# Altium PCB PCB1.PcbDoc
Units mm, origin at the board's own origin, x right, y up, seen from the top; angles counter-clockwise.
Board outline 72.5 x 62.5 mm, 2 copper layers (Top Layer, Bottom Layer); 18 components, 22 nets, 87 pads, 0 vias.
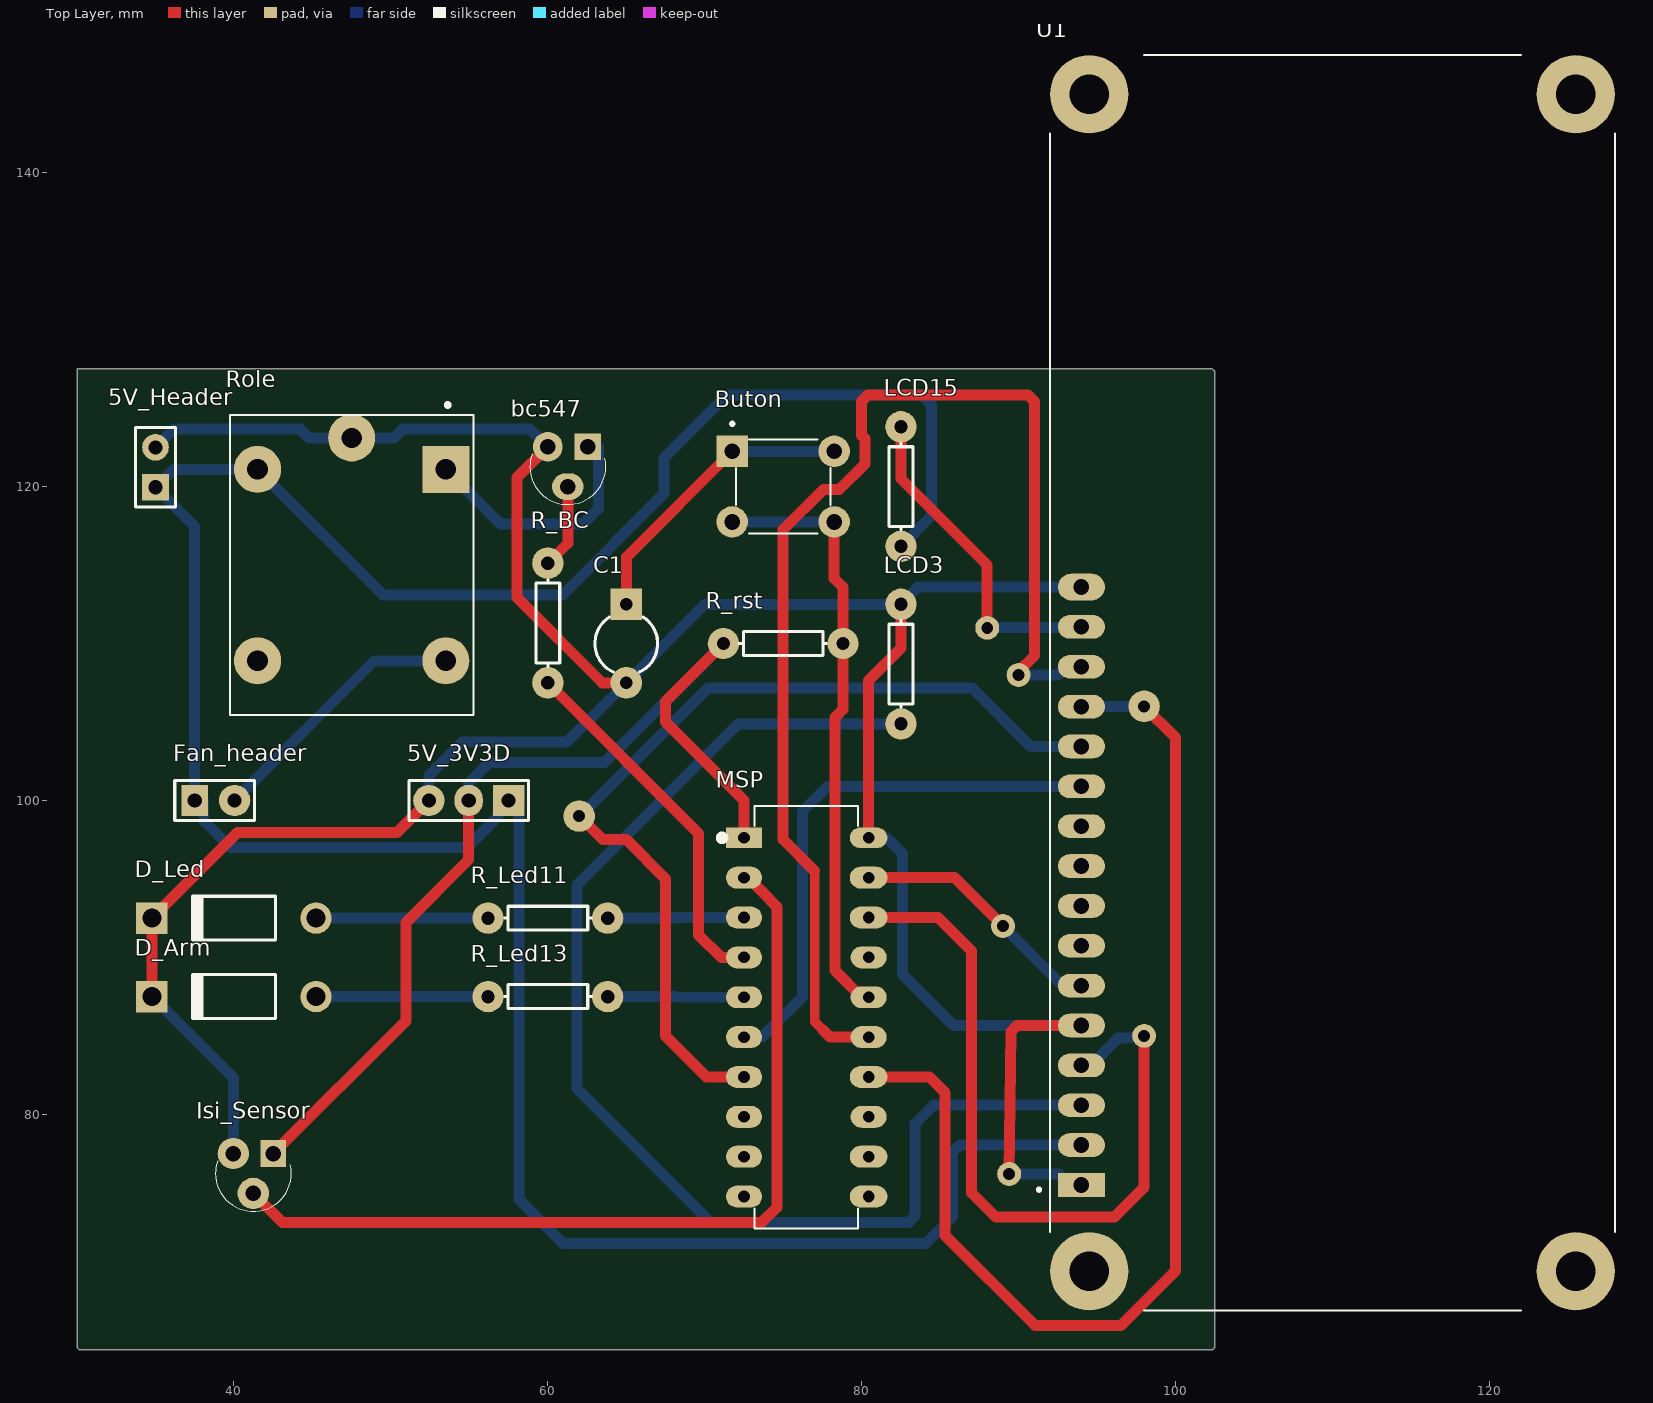
[diagram p0: Top Layer view]
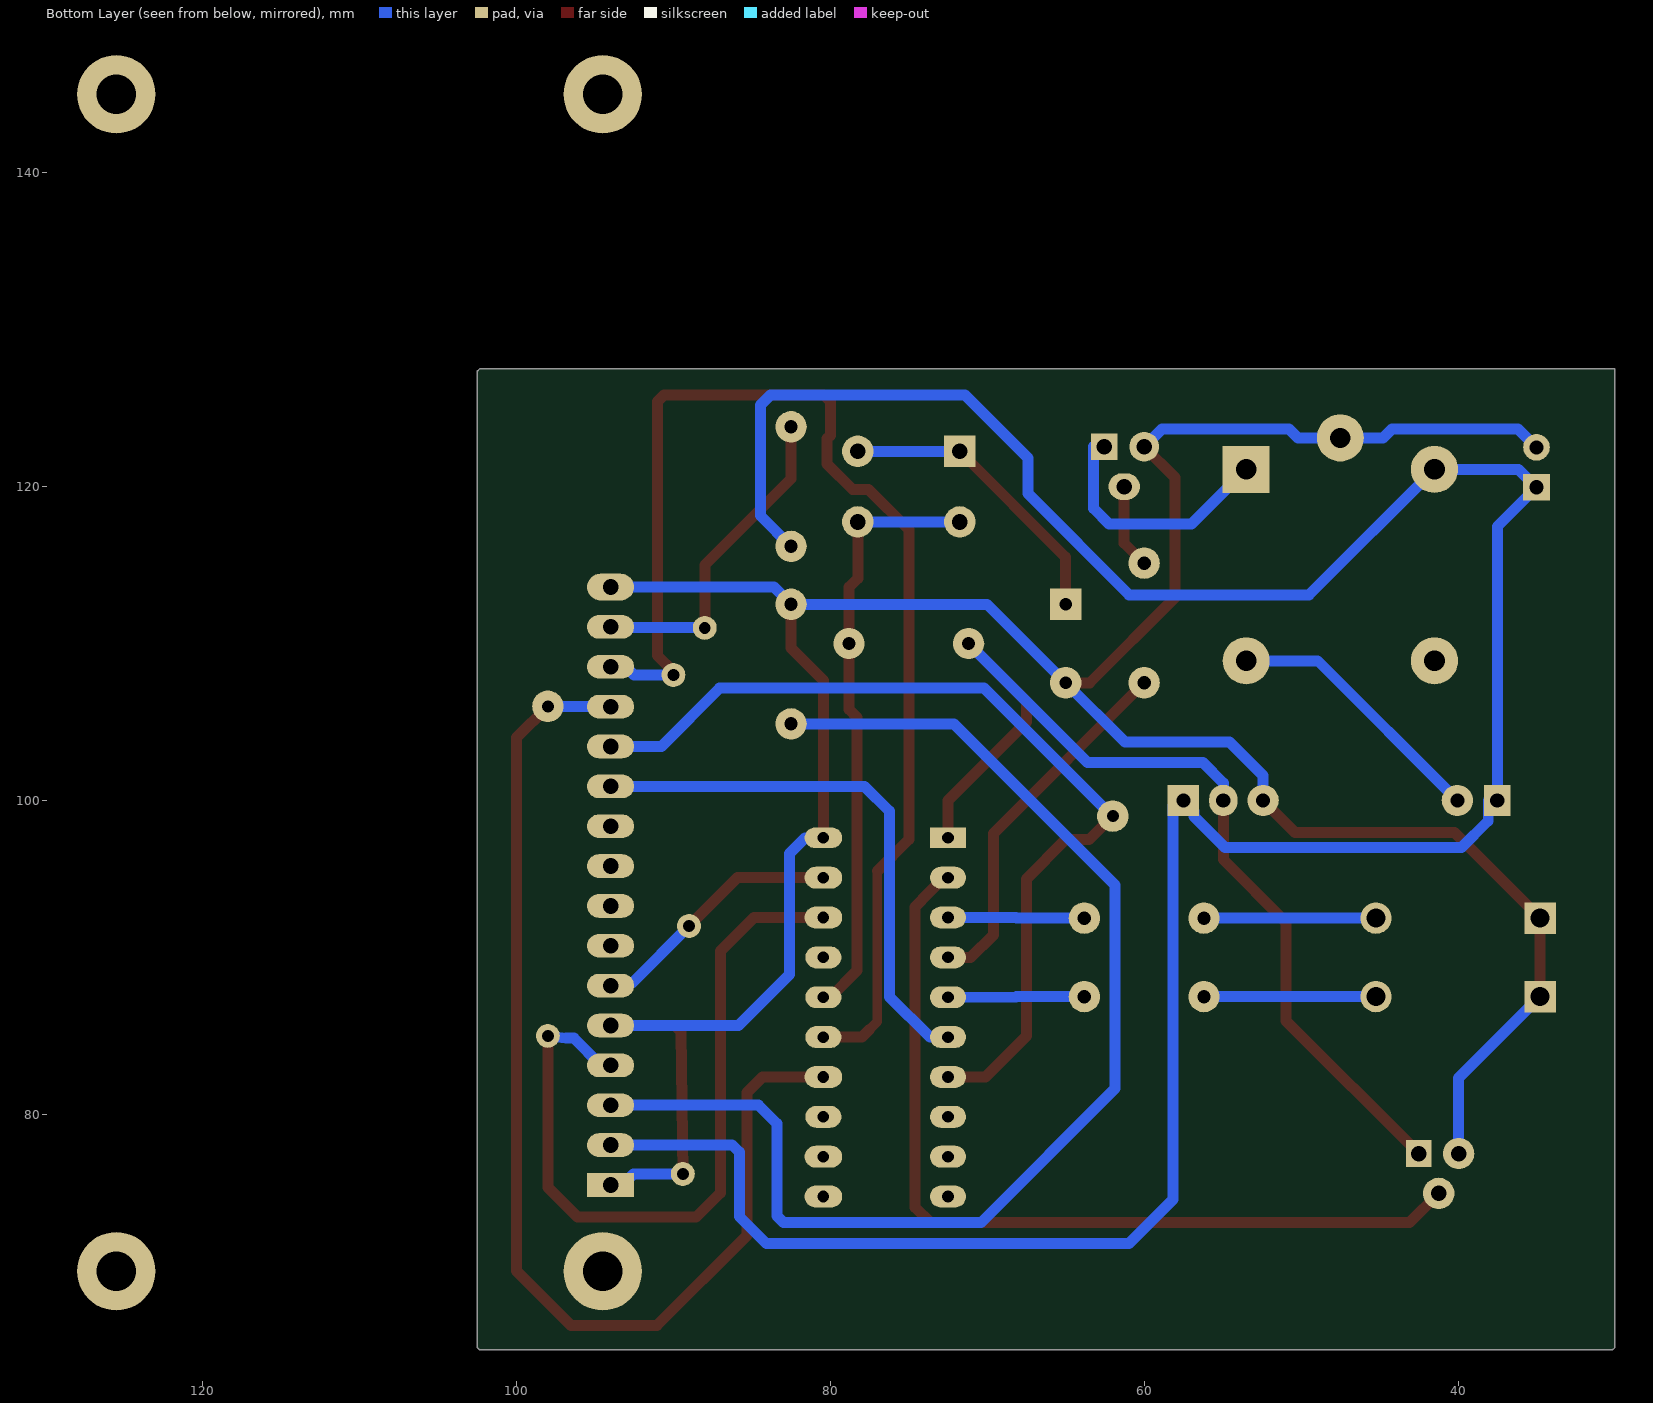
[diagram p1: Bottom Layer view, seen from below]

## Layer stack, top to bottom
Top Solder: solder mask 0.0102, Solder Resist, Dk 3.5
Top Layer: signal copper 0.0356
Dielectric 1: dielectric 0.32, FR-4, Dk 4.8
Bottom Layer: signal copper 0.0356
Bottom Solder: solder mask 0.0102, Solder Resist, Dk 3.5

## Board outline
30.149,65 30,65.149 30,127.5 102.351,127.5 102.5,127.351 102.5,65.149 102.351,65

## Design rules (kind name [scope] priority, off if disabled: settings)
Clearance [All] p1: gap=0.6 ignorepadtopadclearanceinfootprint=FALSE
PolygonConnect [All] p1: connectstyle=Relief reliefconductorwidth=0.254 reliefentries=4 polygonreliefangle="90 Angle" airgapwidth=0.254
RoutingVias [All] p1: holewidth=0.711 width=1.27 viastyle="Through Hole" minholewidth=0.711 minwidth=1.27 maxholewidth=0.711 maxwidth=1.27
SolderMaskExpansion [All] p1: expansion=0.102 istentingtop=FALSE
Width [All] p1: maxlimit=0.8 minlimit=0.5 preferedwidth=0.7 minimp=50.000000 maximp=50.000000 favimp=50.000000
30 further rules are at their usual default settings.

## Classes and differential pairs
component class Sheet1: 5V_3V3D 5V_Header bc547 Buton C1 D_Arm D_Led Fan_header Isi_Sensor LCD3 LCD15 MSP R_BC R_Led11 R_Led13 R_rst U1

## Components (designator, comment, footprint, x,y, rotation, side; value= is the part's Value field where it differs from the comment)
5V_3V3D "Header 3" HDR1X3 57.5,100 r180 top
5V_Header "Header 2" HDR1X2#1 35,119.96 r90 top
bc547 "BC547B" TO127P254X732-3#1 60,120 r180 top
Buton "TS02-66-95-BK-260-LCR-D" SW_TS02-66-95-BK-260-LCR-D 75,120 r0 top (schematic designator Role)
C1 "Cap2" CAPR5-4X5 65,110 r270 top value=100pF
D_Arm "Diode 1N4007" DO-41 40,87.5 r180 top
D_Led "Diode 1N4007" DO-41 40,92.5 r180 top
Fan_header "Header 2" HDR1X2#2 37.5,100 r0 top
Isi_Sensor "MCP9700" TO127P254X732-3#2 39.96,74.96 r180 top (schematic designator Isı_Sensor)
LCD3 "" AXIAL-0.3 82.5,108.69 r270 top value=2.2
LCD15 "Res1" AXIAL-0.3 82.5,120 r270 top value=33
MSP "MSP430G2553IN20" DIP794W45P254L2692H508Q20 76.47,86.19 r0 top
R_BC "Res1" AXIAL-0.3 60,111.31 r270 top value=4.7K
R_Led11 "Res1" AXIAL-0.3 60,92.5 r180 top value=1K
R_Led13 "Res1" AXIAL-0.3 60,87.5 r180 top value=1K
R_rst "Res1" AXIAL-0.3 75,110 r180 top value=1K
Role "SRD-05VDC-SL-C" RELAY_SRD-05VDC-SL-C 47.5,115 r270 top
U1 "LCD2X16" LCD_LCD2X16 110,107.5 r90 top

## Footprints (in the part's own frame and the unit in brackets; to place one, negate y for a bottom-side part, rotate by r counter-clockwise, add the part's x,y. Pads: shape width x height; smd on the part's side, far side on the other; paste and mask are expansions set on the pad)
AXIAL-0.3 [mm] "Axial Device, Thru-Hole; 2 Leads; 0.3 in Pin Spacing"
  round 2 hole 0.85: 1(-3.81,0) 2(3.81,0)
  silkscreen extent -2.77,-0.76 2.77,0.76
CAPR5-4X5 [mm] "Capacitor; 2 Leads"
  rect 2x2 hole 0.8: 1(-2.5,0)
  round 2 hole 0.8: 2(2.5,0)
  silkscreen extent -1.69,-2 1.82,2
DIP794W45P254L2692H508Q20 [mm]
  rect 2.3x1.3 hole 0.74: 1(-3.97,11.43)
  oval 2.3x1.4 hole 0.74: 2(-3.97,8.89) 3(-3.97,6.35) 4(-3.97,3.81) 5(-3.97,1.27) 6(-3.97,-1.27) 7(-3.97,-3.81) 8(-3.97,-6.35) 9(-3.97,-8.89) 10(-3.97,-11.43) 13(3.97,-6.35) 15(3.97,-1.27) 16(3.97,1.27) 17(3.97,3.81)
  oval 2.4x1.4 hole 0.74: 11(3.97,-11.43) 12(3.97,-8.89) 14(3.97,-3.81) 18(3.97,6.35) 19(3.97,8.89)
  oval 2.4x1.3 hole 0.74: 20(3.97,11.43)
  silkscreen extent -5.57,-13.46 3.3,13.46
DO-41 [mm] "Diode, Axial; Body 5.2 x 2.7 mm (LxDia. max), Lead Dia. 0.86 mm (max)"
  round 2 hole 1.2: 1(-5.23,0)
  rect 2x2 hole 1.2: 2(5.23,0)
  silkscreen extent -2.65,-1.4 2.75,1.4
HDR1X2#1 [mm] "Connector; Header; 2 Position"
  rect 1.7x1.7 hole 0.9: 1(0,0)
  round 1.7 hole 0.9: 2(2.54,0)
  silkscreen extent -1.27,-1.27 3.81,1.27
HDR1X2#2 [mm] "Connector; Header; 2 Position"
  rect 1.7x2 hole 0.9: 1(0,0)
  round 2 hole 0.9: 2(2.54,0)
  silkscreen extent -1.27,-1.27 3.81,1.27
HDR1X3 [mm] "Connector; Header; 3 Position"
  rect 2x2 hole 0.9: 1(0,0)
  oval 1.8x2 hole 0.9: 2(2.54,0)
  round 2 hole 0.9: 3(5.08,0)
  silkscreen extent -1.27,-1.27 6.35,1.27
LCD_LCD2X16 [mm]
  rect 1.508x3 hole 1: 1(-32,16)
  oval 1.508x3 hole 1: 2(-29.46,16) 3(-26.92,16) 4(-24.38,16) 5(-21.84,16) 6(-19.3,16) 7(-16.76,16) 8(-14.22,16) 9(-11.68,16) 10(-9.14,16) 11(-6.6,16) 12(-4.06,16) 13(-1.52,16) 14(1.02,16) 15(3.56,16)
  oval 1.7x3 hole 1: 16(6.1,16)
  round 5 hole 2.5: S1(-37.5,15.5) S2(37.5,15.5) S3(37.5,-15.5) S4(-37.5,-15.5)
  silkscreen extent -40,-18 40,18.8, body extent -40,-18 40,18, height 7
RELAY_SRD-05VDC-SL-C [mm]
  rect 3x3 hole 1.32: A1(-6.1,6)
  round 3 hole 1.32: A2(-6.1,-6) NC(6.1,6) NO(6.1,-6)
  round 3 hole 1.29: COM(-8.1,0)
  silkscreen extent -10.3,-7.75 9.55,7.75, body extent -9.6,-7.8 9.6,7.8, height 15.8
SW_TS02-66-95-BK-260-LCR-D [mm]
  rect 2x2 hole 1: 1(-3.25,2.25)
  round 2 hole 1: 2(3.25,2.25) 3(-3.25,-2.25) 4(3.25,-2.25)
  silkscreen extent -3.35,-3 3,4.1, body extent -3.95,-3 3.95,3, height 9.7
TO127P254X732-3#1 [mm]
  rect 1.7x1.7 hole 0.991: 1(-2.54,-2.54)
  oval 2x1.7 hole 0.991: 2(-1.27,0)
  round 1.9 hole 0.991: 3(0,-2.54)
  silkscreen extent -3.7,-2.1 1.14,1.14, body extent -2.37,-1.81 2.37,1.81, height 5.33
TO127P254X732-3#2 [mm]
  rect 1.6x1.7 hole 0.991: 1(-2.54,-2.54)
  round 2 hole 0.991: 2(-1.27,0) 3(0,-2.54)
  silkscreen extent -3.7,-2.1 1.14,1.14, body extent -2.37,-1.81 2.37,1.81, height 5.33

## Part data
5V_3V3D: "Header, 3-Pin", LatestRevisionDate=17-Jul-2002, LatestRevisionNote="Re-released for DXP Platform.", Publisher="Altium Limited"
5V_Header Fan_header: "Header, 2-Pin", LatestRevisionDate=17-Jul-2002, LatestRevisionNote="Re-released for DXP Platform.", Publisher="Altium Limited"
bc547: "NPN Epitaxial Silicon Transistor", Package=None, Availability=Unavailable, MF="{'manufacturer': u'ON Semiconductor'}", MP=BC547B, Price=None
Buton: Package=None, Availability=Unavailable, MF="{'manufacturer': u'CUI Devices'}", MP=TS02-66-95-BK-260-LCR-D, Price=None
C1: "Capacitor", PackageDescription="Capacitor; 2 Leads", PackageReference=CAPR5-4X5, Published=23-Sep-2002, Publisher="Altium Limited"
D_Arm D_Led: "1 Amp General Purpose Rectifier", Code_JEDEC=DO-204-AL, ComponentLink1Description="Manufacturer Link", ComponentLink1URL=http://www.fairchildsemi.com/, ComponentLink2Description=Datasheet, ComponentLink2URL=http://www.fairchildsemi.com/ds/1N%2F1N4001.pdf, DatasheetVersion=1998, LatestRevisionDate=17-Jul-2002, LatestRevisionNote="Re-released for DXP Platform.", PackageDescription="Diode, Axial; Body 5.2 x 2.7 mm (LxDia. max), Lead Dia. 0.86 mm (max)", PackageReference=DO-41, PackageVersion=Aug-1999, Published=8-Jun-2000, Publisher="Altium Limited"
Isi_Sensor: library part BC547B, "NPN Epitaxial Silicon Transistor", Package=None, Availability=Unavailable, MF="{'manufacturer': u'ON Semiconductor'}", MP=BC547B, Price=None
LCD3: library part Res1, "Resistor", LatestRevisionDate=17-Jul-2002, LatestRevisionNote="Re-released for DXP Platform.", PackageDescription="Axial Device, Thru-Hole; 2 Leads; 0.3 in Pin Spacing", PackageReference=AXIAL-0.3, Published=8-Jun-2000, Publisher="Altium Limited"
LCD15 R_BC R_Led11 R_Led13 R_rst: "Resistor", LatestRevisionDate=17-Jul-2002, LatestRevisionNote="Re-released for DXP Platform.", PackageDescription="Axial Device, Thru-Hole; 2 Leads; 0.3 in Pin Spacing", PackageReference=AXIAL-0.3, Published=8-Jun-2000, Publisher="Altium Limited"
MSP: "MSP430G2x53, MSP430G2x13 Mixed Signal Microcontroller 20-PDIP -40 to 85", Package=None, Availability=Unavailable, MF="{'manufacturer': u'Texas Instruments'}", MP=MSP430G2553IN20, Price=None
Role: "5V Trigger Relay Module For Arduino And Raspberry Pi 5V Trigger Relay Module For Arduino And Raspberry Pi", Package=None, Availability=Unavailable, MF="{'manufacturer': u'Songle Relay'}", MP=SRD-05VDC-SL-C, Price=None
U1: "Display; Display: LCD 2x16 characters (blue backlight)", Package=None, Availability=Unavailable, MF="{'manufacturer': u'mikroElektronika'}", MP=LCD2X16, Price=None

## Free pads (board coordinates)
  round 2 hole 0.762: 3(62,99) 4(98,106)
  round 1.524 hole 0.762: 5(88,111) 6(90,108) 7(89,92) 8(98,85) 9(89.4,76.2)

## Nets (pads, with @x,y where several pads share a name; then routed paths per layer and width w, separated by ;. In a path a pad name is that pad's centre, name@x,y a point inside that pad or via, vN(x,y) a via of type N, cw(c..) or ccw(c..) an arc to the next point about the centre after c; other vN are vias at no path point)
3V3: 5V_3V3D.2 Isi_Sensor.1 MSP.1 R_rst.2 | length 64.7
  Top Layer w0.7: Isi_Sensor.1 50.952,85.952 50.952,92.233 54.96,96.241 5V_3V3D.2 ; R_rst.2 67.5,106.31 67.5,105 72.5,100 MSP.1
  Bottom Layer w0.7: 5V_3V3D.2 54.96,101.112 56.261,102.413 63.603,102.413 R_rst.2
+5: 5V_3V3D.1 5V_Header.1 Fan_header.1 LCD15.2 Role.A2 U1.2 | length 182.4
  Bottom Layer w0.7: LCD15.2 84.455,118.145 84.455,125.197 83.82,125.832 71.425,125.832 67.412,121.818 67.412,119.558 60.96,113.106 49.494,113.106 Role.A2 36.14,121.1 5V_Header.1 37.5,117.46 Fan_header.1 38.075,100 38.075,98.704 39.779,97 54.836,97 56.82,98.984 56.82,99.32 5V_3V3D.1 57.5,99.67 58.166,99.67 58.166,74.574 60.96,71.78 84.08,71.78 85.8,73.5 85.8,77.59 86.25,78.04 U1.2
But1: Buton.1 Buton.2 C1.1 | length 19
  Top Layer w0.7: C1.1 65,115.5 Buton.1
  Bottom Layer w0.7: Buton.1 Buton.2
GND: 5V_3V3D.3 5V_Header.2 bc547.3 C1.2 D_Arm.2 D_Led.2 Isi_Sensor.3 LCD3.1 MSP.20 pad.9 Role.COM U1.1 U1.5 U1.16 | length 189.5
  Top Layer w0.7: D_Arm.2 D_Led.2 40.238,97.968 50.388,97.968 5V_3V3D.3 ; bc547.3 58.039,120.579 58.039,112.928 63.467,107.5 C1.2 ; MSP.20 80.44,107.643 82.5,109.703 LCD3.1 ; pad.9 89.5,85.253 89.702,85.455 89.907,85.66 U1.5
  Bottom Layer w0.7: D_Arm.2 39.96,82.31 Isi_Sensor.3 ; 5V_Header.2 36.173,123.673 44.208,123.673 44.78,123.1 Role.COM 50.19,123.1 50.763,123.673 58.867,123.673 bc547.3 ; 5V_3V3D.3 52.42,101.6 54.554,103.734 61.234,103.734 C1.2 70,112.5 LCD3.1 83.6,113.6 U1.16 ; MSP.20 81.61,97.62 82.601,96.629 82.601,88.9 85.841,85.66 U1.5 ; pad.9 92.554,76.2 93.254,75.5 U1.1
Netbc547_1: bc547.1 Role.A1 | length 16.2
  Bottom Layer w0.7: Role.A1 56.973,117.627 62.23,117.627 63.221,118.618 63.221,122.54 bc547.1
Netbc547_2: bc547.2 R_BC.1 | length 5.4
  Top Layer w0.7: R_BC.1 61.27,116.39 bc547.2
NetD_Arm_1: D_Arm.1 R_Led13.2 | length 11
  Bottom Layer w0.7: D_Arm.1 R_Led13.2
NetD_Led_1: D_Led.1 R_Led11.2 | length 11
  Bottom Layer w0.7: D_Led.1 R_Led11.2
NetFan_header_2: Fan_header.2 Role.NC | length 17.1
  Bottom Layer w0.7: Fan_header.2 48.94,108.9 Role.NC
NetLCD3_2: LCD3.2 U1.3 | length 80.1
  Bottom Layer w0.7: LCD3.2 72.122,104.88 61.849,94.607 61.849,81.636 70.383,73.101 81.601,73.101 81.61,73.11 82.99,73.11 83.4,73.52 83.4,79.4 84.58,80.58 U1.3
NetLCD15_1: LCD15.1 pad.5 U1.15 | length 21.1
  Top Layer w0.7: LCD15.1 82.5,120.5 88,115 pad.5
  Bottom Layer w0.7: pad.5 88.03,111.03 93.97,111.03 U1.15
P1.0: Isi_Sensor.2 MSP.2 | length 56.6
  Top Layer w0.7: Isi_Sensor.2 43.089,73.101 73.625,73.101 74.6,74.077 74.6,93.223 73.7,94.123 73.7,94.141 72.761,95.08 MSP.2
P1.1: MSP.3 R_Led11.1 | length 8.7
  Bottom Layer w0.7: R_Led11.1 68.123,92.5 68.163,92.54 MSP.3
P1.2: MSP.4 R_BC.2 | length 23.5
  Top Layer w0.7: R_BC.2 69.614,97.886 69.614,91.44 71.054,90 MSP.4
P1.3: MSP.5 R_Led13.1 | length 8.7
  Bottom Layer w0.7: R_Led13.1 68.123,87.5 68.163,87.46 MSP.5
P1.4: MSP.6 U1.11 | length 35
  Bottom Layer w0.7: MSP.6 73.66,84.92 76.225,87.485 76.225,99.314 77.811,100.9 U1.11
P1.5: MSP.7 pad.3 U1.12 | length 60.2
  Top Layer w0.7: pad.3 63.5,97.5 65,97.5 67.5,95 67.5,85 70.12,82.38 MSP.7
  Bottom Layer w0.7: pad.3 62.043,99 70.206,107.163 87.046,107.163 90.768,103.44 U1.12
P1.6: MSP.14 pad.4 U1.13 | length 73.7
  Top Layer w0.7: MSP.14 84.32,82.38 85.319,81.381 85.319,72.288 91.059,66.548 96.52,66.548 100,70.028 100,81.579 100,104 pad.4
  Bottom Layer w0.7: U1.13 94.01,105.99 97.99,105.99 pad.4
P1.7: MSP.15 pad.6 U1.14 | length 80.4
  Top Layer w0.6: 76.99,95.5 77,95.49 77,85.91 77.5,85.41
  Top Layer w0.7: 76.99,95.5 76.99,95.51 75,97.5 75,117.258 77.555,119.813 78.57,119.813 80.2,121.442 80.2,123.058 80,123.258 80,125.422 80.41,125.832 90.59,125.832 91,125.422 91,109.223 90,108.223 pad.6 ; 77.5,85.41 77.99,84.92 MSP.15
  Bottom Layer w0.7: pad.6 92.515,108 93.035,108.52 U1.14
P2.6: MSP.19 pad.7 U1.6 | length 16.4
  Top Layer w0.7: MSP.19 85.92,95.08 pad.7
  Bottom Layer w0.7: pad.7 92.645,88.355 93.845,88.355 U1.6
P2.7: MSP.18 pad.8 U1.4 | length 49.7
  Top Layer w0.7: MSP.18 84.86,92.54 87,90.4 87,75 88.543,73.457 96.114,73.457 98,75.343 pad.8
  Bottom Layer w0.7: U1.4 94.616,83.12 96.346,84.851 96.851,84.851 pad.8
RST: Buton.3 Buton.4 MSP.16 R_rst.1 | length 38.4
  Top Layer w0.7: Buton.4 78.25,114.149 78.81,113.589 R_rst.1 78.81,105.81 78.29,105.29 78.29,89.16 79.99,87.46 MSP.16
  Bottom Layer w0.7: Buton.3 Buton.4
pads on no net: MSP.8 MSP.9 MSP.10 MSP.11 MSP.12 MSP.13 MSP.17 Role.NO U1.7 U1.8 U1.9 U1.10 U1.S1 U1.S2 U1.S3 U1.S4